# Altium PCB npm1300_qeaa_config4.PcbDoc
Units mm, origin at the board's own origin, x right, y up, seen from the top; angles counter-clockwise.
Board outline 16.8 x 14 mm, 4 copper layers (Top Layer, Mid-Layer 1, Mid-Layer 2, Bottom Layer), stack 1.592 mm thick; 25 components, 32 nets, 81 pads, 59 vias.
Unrouted connection lines stored in the file: 23.
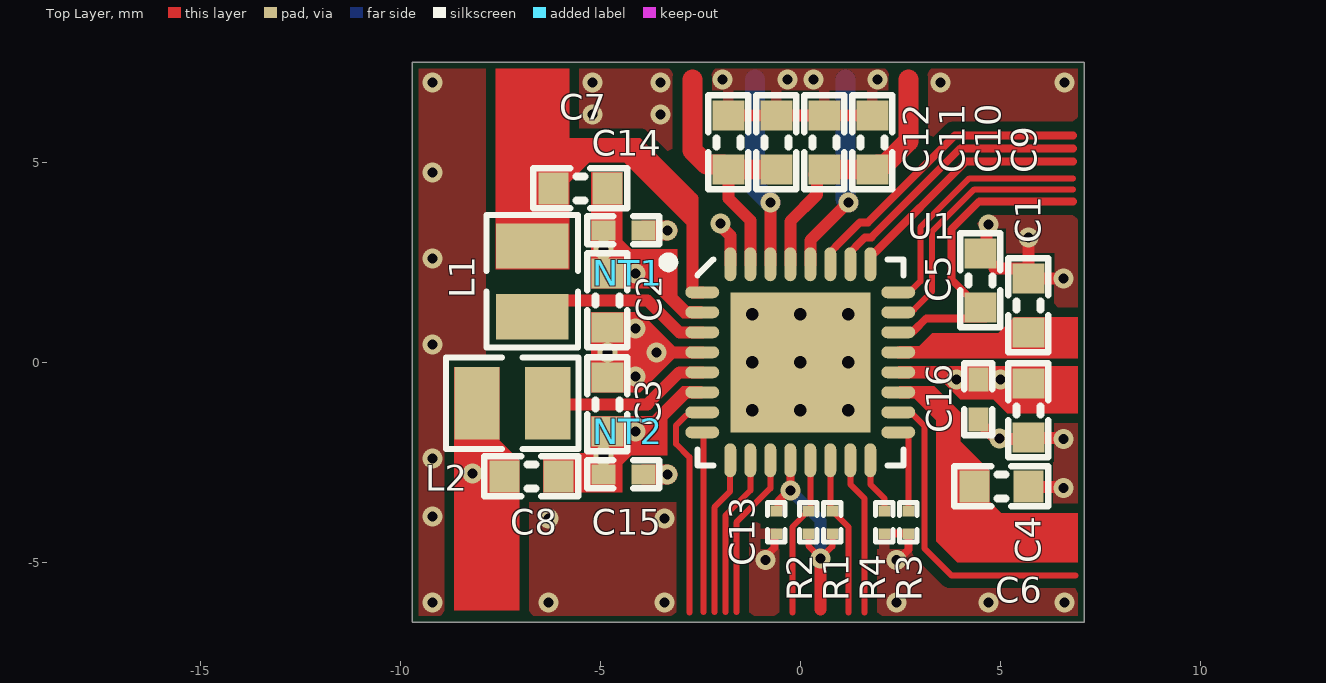
[diagram p0: Top Layer view]
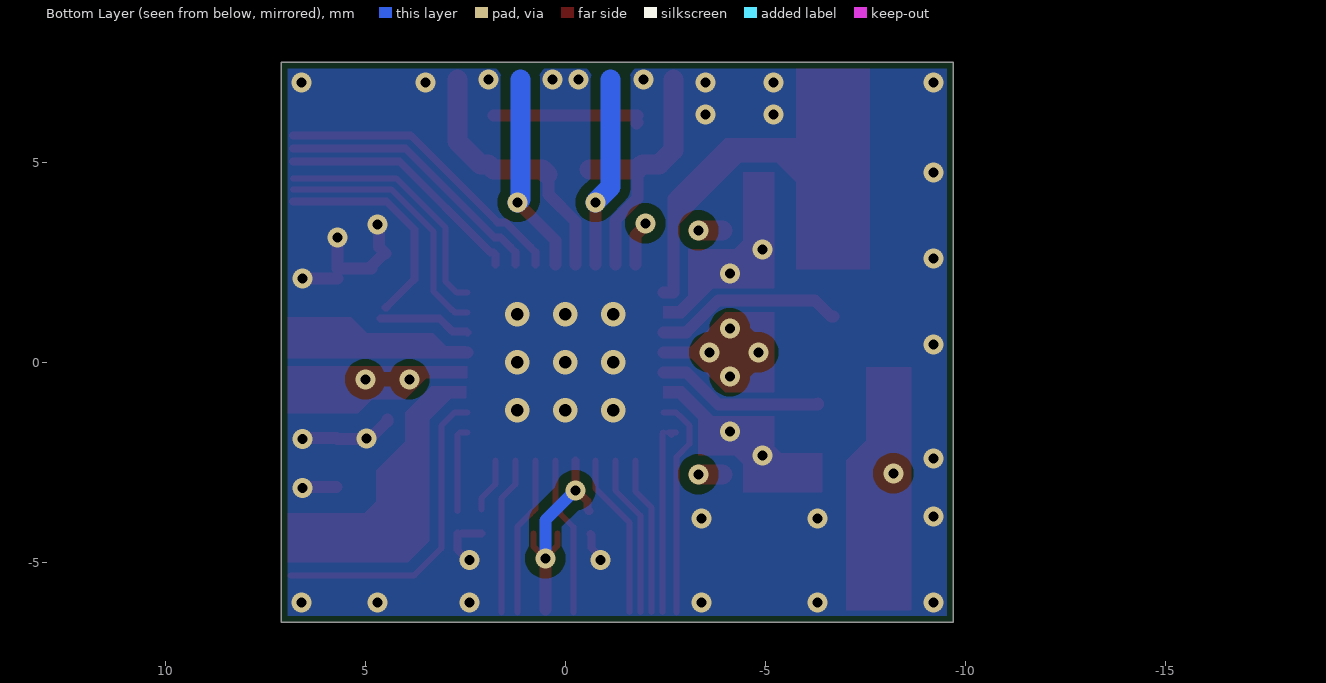
[diagram p1: Bottom Layer view, seen from below]
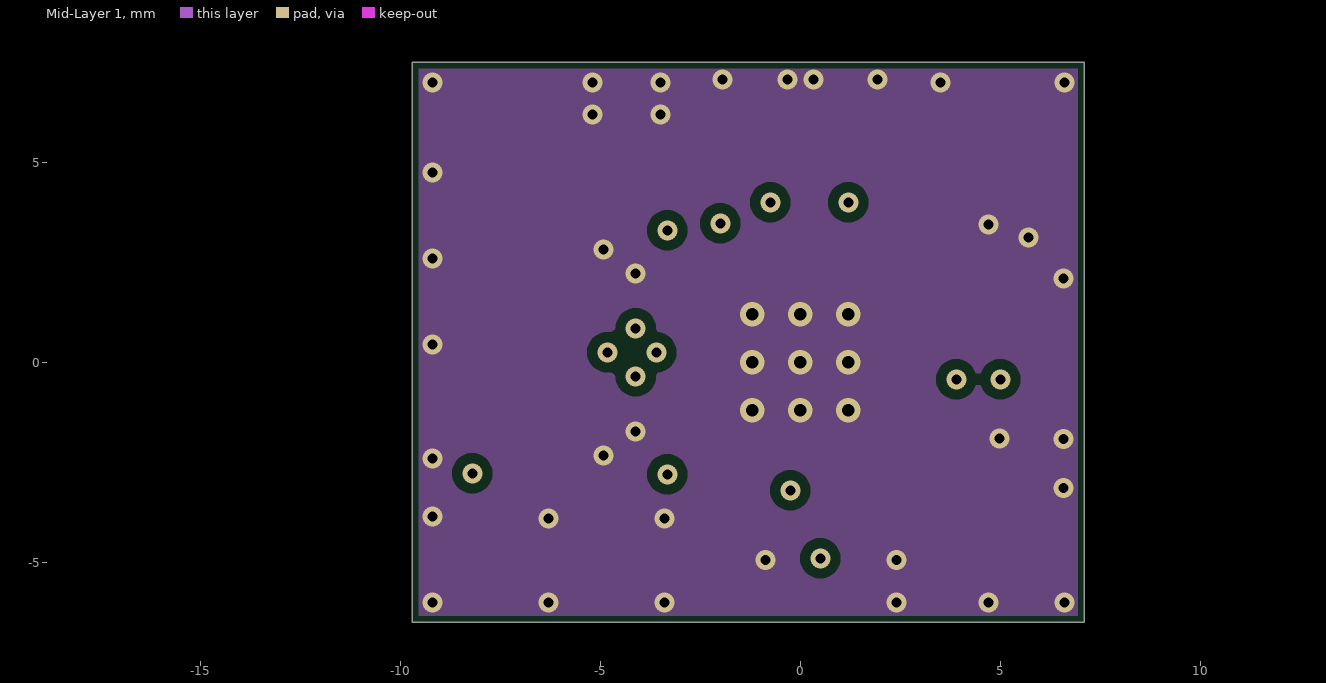
[diagram p2: Mid-Layer 1]
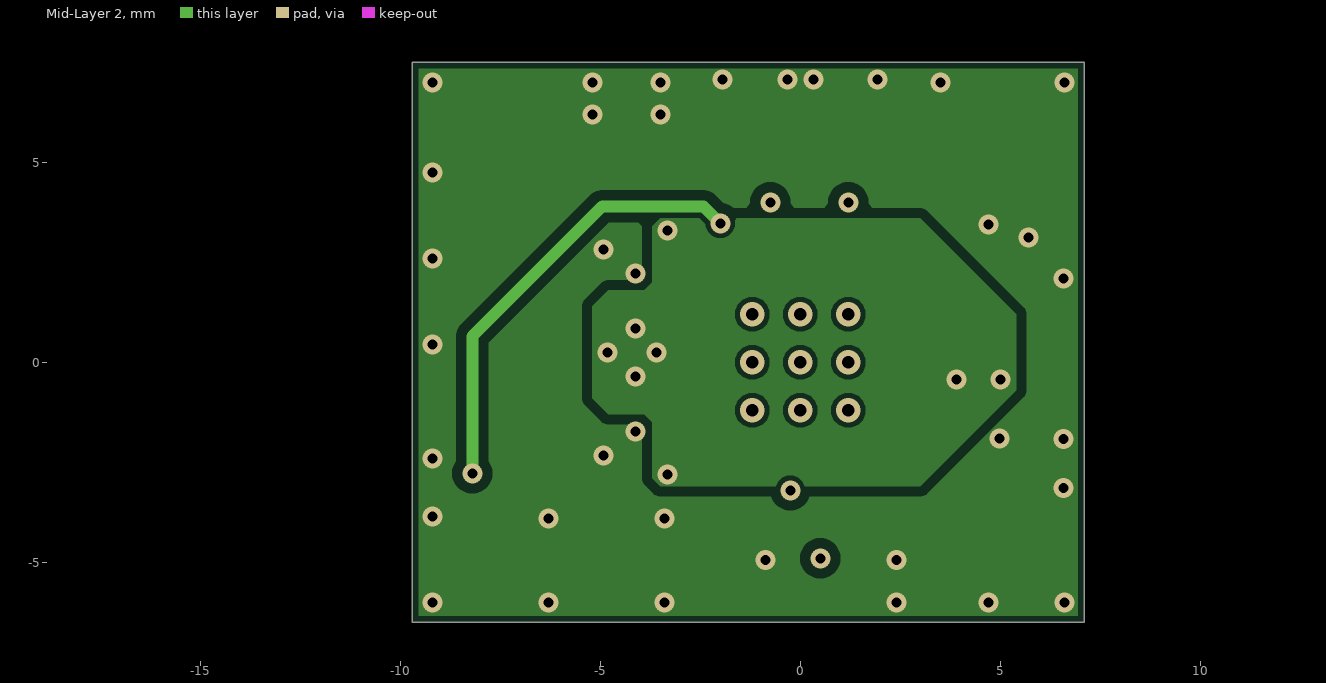
[diagram p3: Mid-Layer 2]
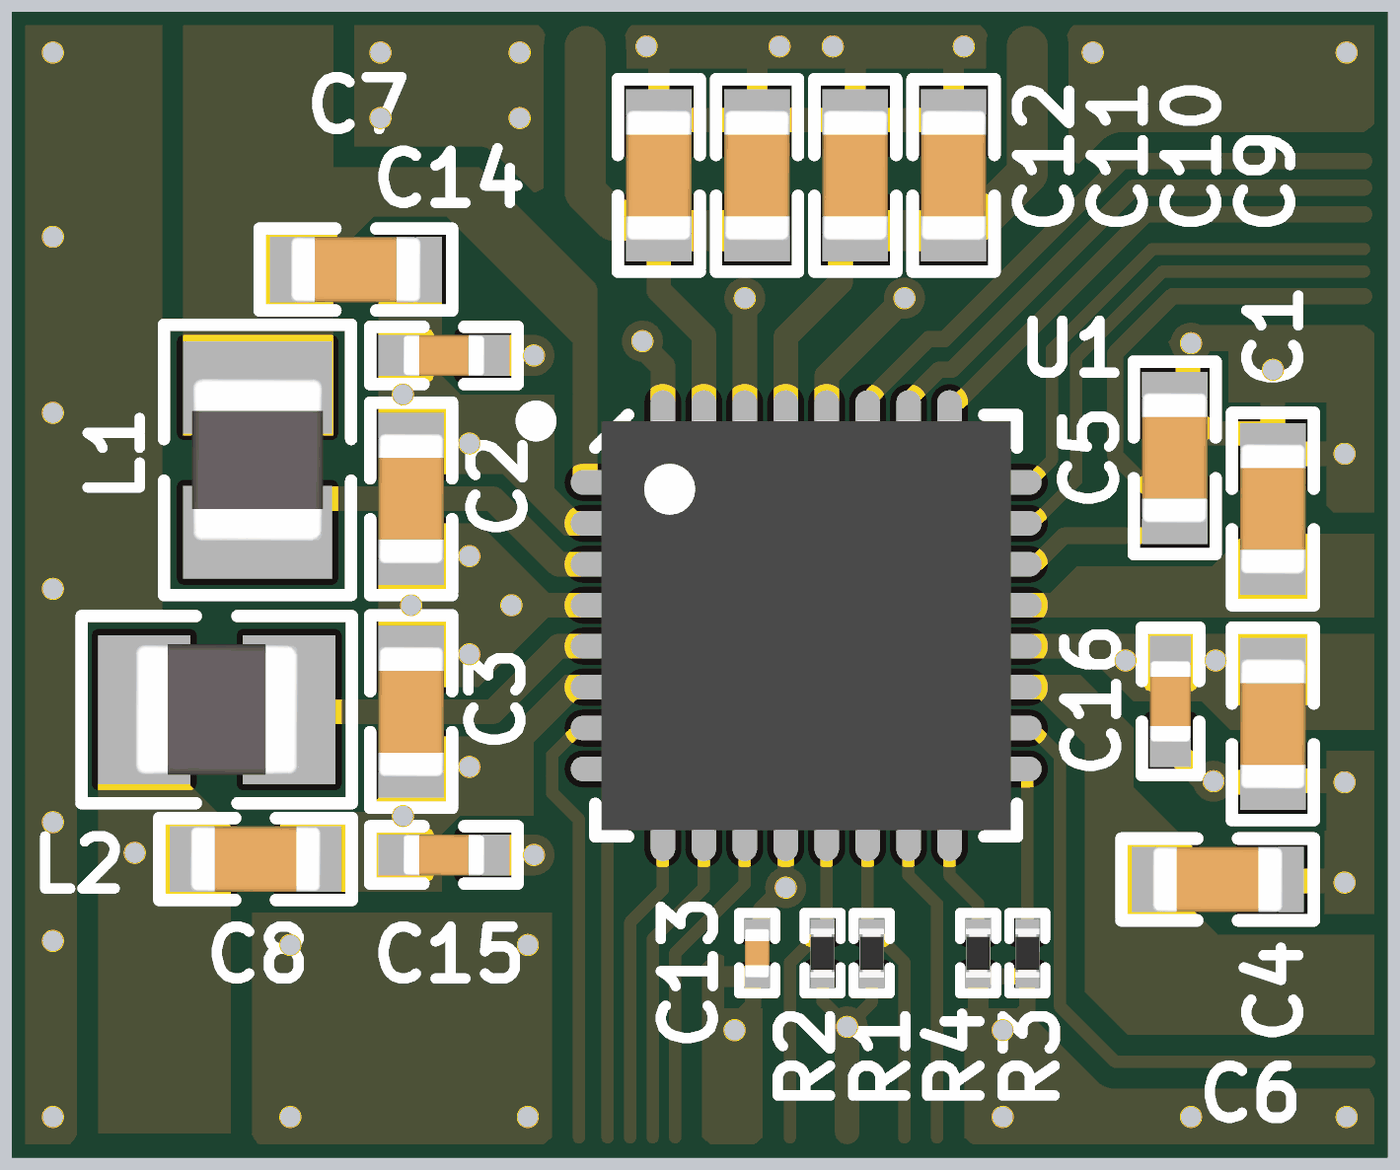
[diagram p4: 3D render of the assembled board from above, using the file's embedded part models]

## Layer stack, top to bottom
Top Solder: solder mask 0.0102, Solder Resist, Dk 3.5
Top Layer: signal copper 0.0356
Dielectric1: prepreg 0.075, FR-4, Dk 4.8
Mid-Layer 1: signal copper 0.0356
Dielectric2: core 1.3, FR-4, Dk 4.8
Mid-Layer 2: signal copper 0.0356
Dielectric 2: prepreg 0.075, FR-4, Dk 4.8
Bottom Layer: signal copper 0.0356
Bottom Solder: solder mask 0.0102, Solder Resist, Dk 3.5

## Board outline
-9.7,-6.5 -9.7,7.5 7.1,7.5 7.1,-6.5

## Design rules (kind name [scope] priority, off if disabled: settings)
BoardOutlineClearance [All] p1: gap=0.15 ignorepadtopadclearanceinfootprint=FALSE
Clearance Clearance_PVSS_Via [InNet('PVSS1') or InNet('PVSS2') vs InNet('GND')] p1: gap=0.125 ignorepadtopadclearanceinfootprint=FALSE except(0.025: SMDPad-Via) // PVSS1 and PVSS2 GND-via clearance
Clearance Polygon_Clearance [(InNamedPolygon('Top_Layer-GND')) or (InNamedPolygon('Bottom_Layer-GND')) or (InNamedPolygon('Mid_Layer_1-GND')) or (InNamedPolygon('Mid_Layer_2-GND'))] p2: gap=0.254 ignorepadtopadclearanceinfootprint=FALSE except(0: Arc-Hole Track-Hole SMDPad-Hole THPad-Hole Via-Hole Fill-Hole Poly-Hole Region-Hole Text-Hole)
Clearance [All] p3: gap=0.125 ignorepadtopadclearanceinfootprint=FALSE
ComponentClearance [All] p1 off: gap=0.254 collisioncheckmode=3 verticalgap=0.254 showdistances=FALSE
DiffPairsRouting [All] p1: maxlimit=0.15 minlimit=0.127 mostfreqgap=0.15 toplayer_mingap=0.15 toplayer_minwidth=0.15 toplayer_maxwidth=0.15 toplayer_prefwidth=0.15 bottomlayer_mingap=0.15 bottomlayer_minwidth=0.15 bottomlayer_maxwidth=0.15 bottomlayer_prefwidth=0.15 impedanceprofiledriven=TRUE impedanceprofileid={DBD80B30-E3CF-4860-A6C7-45E32F93C55D} impedanceprofilevalue=90.000000 maxuncoupledlength=12.7
FabricationTestPointUsage TestPointUsage [All] p1: valid=0 allowmultiple=FALSE
FabricationTestpoint Testpoint [All] p1: side=3 testpointundercomponent=TRUE minsize=1.016 maxsize=2.54 preferedsize=1.524 minholesize=0 maxholesize=1.016 preferedholesize=0.813 testpointgrid=0.025 allowsidetop=TRUE allowsidebottom=TRUE usegrid=TRUE gridtolerance=0
Height [All] p1 off: minheight=0 maxheight=25.4 prefheight=12.7
HoleSize [All] p1: absolutevalues=TRUE maxlimit=5 minlimit=0.1 maxpercent=80.000 minpercent=20.000
MinimumAnnularRing [All] p1 off: minimumring=0.75
PolygonConnect PolygonConnect_GND [InNet('GND')] p1: thpad.connectstyle=Relief thpad.reliefconductorwidth=0.254 thpad.reliefentries=4 thpad.polygonreliefangle="90 Angle" thpad.airgapwidth=0.254 smdpad.connectstyle=Relief smdpad.reliefconductorwidth=0.254 smdpad.reliefentries=4 smdpad.polygonreliefangle="90 Angle" smdpad.airgapwidth=0.254 via.connectstyle=Direct via.reliefconductorwidth=0.254 via.reliefentries=4 via.polygonreliefangle="90 Angle" via.airgapwidth=0.254
PolygonConnect [All] p2: connectstyle=Direct reliefconductorwidth=0.254 reliefentries=4 polygonreliefangle="90 Angle" airgapwidth=0.254
RoutingVias [All] p1: holewidth=0.305 width=0.61 viastyle="Through Hole" minholewidth=0.305 minwidth=0.61 maxholewidth=0.711 maxwidth=1.27 useviatemplates=TRUE viatemplateguid#1={6F225C6A-EE86-4657-A426-C9A0349870D4} viatemplatename#1=v50h25m0mx0
ShortCircuit ShortCircuit_PVSS [InNet('PVSS1') or InNet('PVSS2') vs InNet('GND')] p1: allowed=TRUE
ShortCircuit [All] p2: allowed=FALSE
SilkToSolderMaskClearance SilkscreenOverComponentPads [IsPad] p1: minsilkscreentomaskgap=0.254 clearancetoexposedcopper=TRUE
SolderMaskExpansion SolderMaskExpansion_Vias [IsVia] p1: expansion=0.102 istentingtop=TRUE
SolderMaskExpansion [All] p2: expansion=0.076 istentingtop=FALSE
SupplyNets "Schematic Supply Nets_13" [InNet('PVSS2')] p1: voltage=0.000
SupplyNets "Schematic Supply Nets_12" [InNet('VBUSOUT')] p2: voltage=0.000
SupplyNets "Schematic Supply Nets_11" [InNet('VINLDO2')] p3: voltage=0.000
SupplyNets "Schematic Supply Nets_10" [InNet('VBAT')] p4: voltage=0.000
SupplyNets "Schematic Supply Nets_9" [InNet('VOUTLDO1')] p5: voltage=0.000
SupplyNets "Schematic Supply Nets_8" [InNet('VOUTLDO2')] p6: voltage=0.000
SupplyNets "Schematic Supply Nets_7" [InNet('VDDIO')] p7: voltage=0.000
SupplyNets "Schematic Supply Nets_6" [InNet('GND')] p8: voltage=0.000
SupplyNets "Schematic Supply Nets_5" [InNet('VINLDO1')] p9: voltage=0.000
SupplyNets "Schematic Supply Nets_4" [InNet('VSYS')] p10: voltage=0.000
SupplyNets "Schematic Supply Nets_3" [InNet('VBUSIN')] p11: voltage=0.000
SupplyNets "Schematic Supply Nets_2" [InNet('PVSS1')] p12: voltage=0.000
SupplyNets "Schematic Supply Nets_1" [InNet('VOUT2')] p13: voltage=0.000
SupplyNets "Schematic Supply Nets" [InNet('VOUT1')] p14: voltage=0.000
UnRoutedNet [All] p1: checkbadconnections=TRUE
Width [All] p1: maxlimit=2 minlimit=0.12 preferedwidth=0.3
21 further rules are at their usual default settings.

## Components (designator, comment, footprint, x,y, rotation, side; value= is the part's Value field where it differs from the comment)
C1 "1.0µF" CAPC1608X06L 5.7,1.425 r270 top
C2 "10µF" CAPC1608X06L -4.825,1.55 r270 top
C3 "10µF" CAPC1608X06L -4.825,-1.05 r90 top
C4 "10µF" CAPC1608X06L 5.7,-1.2 r90 top
C5 "1.0µF" CAPC1608X06L 4.5,2.05 r270 top
C6 "2.2µF" CAPC1608X06L 5.025,-3.1 r180 top
C7 "10µF" CAPC1608X06L -5.5,4.35 r180 top
C8 "10µF" CAPC1608X06L -6.725,-2.85 r180 top
C9 "10µF" CAPC1608X06L 1.8,5.5 r270 top
C10 "10µF" CAPC1608X06L 0.6,5.5 r270 top
C11 "10µF" CAPC1608X06L -0.6,5.5 r270 top
C12 "10µF" CAPC1608X06L -1.8,5.5 r270 top
C13 "100nF" CAPC0603X03L_C -0.6,-4 r270 top
C14 "100nF" CAPC1005X04L -4.425,3.3 r180 top
C15 "100nF" CAPC1005X04L -4.425,-2.8 r180 top
C16 "100nF" CAPC1005X04L 4.45,-0.925 r270 top
L1 "2.2µH" INDC2016X10N -6.7,2.025 r270 top
L2 "2.2µH" INDC2016X10N -7.2,-1.025 r0 top
NT1 "Net tie" "2 PIN STARPOINT" -4.317,2.225 r0 top net-tie
NT2 "Net tie" "2 PIN STARPOINT" -4.317,-1.725 r0 top net-tie
R1 "10k" RESC0603X03L_C 0.8,-4 r270 top
R2 "10k" RESC0603X03L_C 0.2,-4 r270 top
R3 "47k" RESC0603X03L_C 2.7,-4 r270 top
R4 "150k" RESC0603X03L_C 2.1,-4 r270 top
U1 "nPM1300-QEAA" Nordic_QFN50P500X500X90-33N 0,0 r0 top locked

## Footprints (in the part's own frame and the unit in brackets; to place one, negate y for a bottom-side part, rotate by r counter-clockwise, add the part's x,y. Pads: shape width x height; smd on the part's side, far side on the other; paste and mask are expansions set on the pad)
"2 PIN STARPOINT" [mil]
  round 6 smd paste-196.85 mask-196.85: 1(8,0) 2(-8,0)
  Top Layer region: -8,-3 8,-3 8,3 -8,3
CAPC0603X03L_C [mm] "Chip Capacitor, 2-Leads, Body 0.6x0.3mm, IPC High Density"
  rect 0.27x0.3 smd mask+0.05: 1(-0.285,0) 2(0.285,0)
  silkscreen extent -0.49,-0.22 0.49,0.22, body extent -0.3,-0.15 0.3,0.15, height 0.3
CAPC1005X04L [mm] "Chip Capacitor, 2-Leads, Body 1.0x0.5mm, IPC High Density"
  rect 0.6x0.5 smd: 1(-0.5,0) 2(0.5,0)
  silkscreen extent -0.9,-0.35 0.9,0.35, body extent -0.5,-0.25 0.5,0.25, height 0.5
CAPC1608X06L [mm] "Chip Capacitor, 2-Leads, Body 1.6x0.8mm, IPC High Density"
  rect 0.75x0.8 smd: 1(-0.675,0) 2(0.675,0)
  silkscreen extent -1.17,-0.5 1.17,0.5, body extent -0.8,-0.4 0.8,0.4, height 0.8
INDC2016X10N [mm] "Chip Inductor, 2-Leads, Body 2.00x1.60mm, IPC Medium Density"
  rect 1.13x1.82 smd: 1(-0.885,0) 2(0.885,0)
  silkscreen extent -1.65,-1.14 1.65,1.14, body extent -1,-0.8 1,0.8, height 1
Nordic_QFN50P500X500X90-33N [mm] "QFN32 5x5x0.85mm, 0.5mm pitch - Medium Density"
  oval 0.85x0.3 smd mask+0.076: 1(-2.45,1.75) 2(-2.45,1.25) 3(-2.45,0.75) 4(-2.45,0.25) 5(-2.45,-0.25) 6(-2.45,-0.75) 7(-2.45,-1.25) 8(-2.45,-1.75) 17(2.45,-1.75) 18(2.45,-1.25) 19(2.45,-0.75) 20(2.45,-0.25) 21(2.45,0.25) 22(2.45,0.75) 23(2.45,1.25) 24(2.45,1.75)
  oval 0.3x0.85 smd mask+0.076: 9(-1.75,-2.45) 10(-1.25,-2.45) 11(-0.75,-2.45) 12(-0.25,-2.45) 13(0.25,-2.45) 14(0.75,-2.45) 15(1.25,-2.45) 16(1.75,-2.45) 25(1.75,2.45) 26(1.25,2.45) 27(0.75,2.45) 28(0.25,2.45) 29(-0.25,2.45) 30(-0.75,2.45) 31(-1.25,2.45) 32(-1.75,2.45)
  rect 3.5x3.5 smd: 33(0,0)
  silkscreen extent -3.42,-2.57 2.57,2.62, body extent -2.5,-2.5 2.5,2.5, height 0.9
RESC0603X03L_C [mm] "Chip Resistor, 2-Leads, Body 0.6x0.3mm, IPC High Density"
  rect 0.27x0.3 smd: 1(-0.285,0) 2(0.285,0)
  silkscreen extent -0.49,-0.22 0.49,0.22, body extent -0.3,-0.15 0.3,0.15, height 0.23

## Part data
C1 C5: library part C0603-1µ0-10V-X5R, "Capacitor, Ceramic, 1.0µF 10V X5R 0603,±10%", Manufacturer=N.A., Part number NEMS=100200528, Artikkelnr Noca=N.A., Author=getr, Component Class=Capacitors, Component Status=Active, ComponentLink1Description=Datasheet, ComponentLink1URL=N.A., ComponentLink2Description="Supplier link", ComponentLink2URL=N.A., Footprint Doc=0603, HelpURL=N.A., LatestRevisionDate=2022-10-06, Manufacturer Part Number=N.A., Note=10V, Pad Count=2, Part Number=C0603-1µ0-10V-X5R, Part number IPS=N.A., Part number Norautron=N.A., PartId=100200528, Published=2022-10-06, Supplier 1=N.A., Supplier 2=N.A., Supplier Part Number 1=N.A., Supplier Part Number 2=N.A.
C2 C3 C4 C7 C8 C9 C10 C11 C12: library part C0603-10µ, "Capacitor, X5R, ±20%", Manufacturer=N.A., Part number IPS=00000007785, Part number NEMS=100200275, Artikkelnr Noca=20039234, Author=rsk, Component Class=Capacitors, Component Status=Active, ComponentLink1Description=Datasheet, ComponentLink1URL=N.A., ComponentLink2Description="Supplier link", ComponentLink2URL=N.A., Footprint Doc=0603, HelpURL=N.A., LatestRevisionDate=2011-01-17, Manufacturer Part Number=N.A., Note=6.3V, Pad Count=2, Part Number=C0603-10µ, Part number Norautron=N.A., PartId=100200275, Published=2011-01-17, Supplier 1=N.A., Supplier 2=N.A., Supplier Part Number 1=N.A., Supplier Part Number 2=N.A.
C6: library part C0603-2.2µ-16V-X7R, "Capacitor, Ceramic, X7R, ±10%, 16V", Manufacturer="Taiyo Yuden", Manufacturer Part Number=EMK107BB7225KA-T, Part number IPS=N.A., Part number NEMS=100200439, Supplier Part Number 1=587-5835-2-ND, Artikkelnr Noca=N.A., Author=rsk, Component Class=Capacitors, Component Status=Active, ComponentLink1Description=Datasheet, ComponentLink1URL=https://ds.yuden.co.jp/TYCOMPAS/ut/specSheet?pn=EMK107BB7225KA-T, ComponentLink2Description="Supplier link", ComponentLink2URL=https://ds.yuden.co.jp/TYCOMPAS/ut/detail?pn=EMK107BB7225KA-T&u=M, Footprint Doc=0603, HelpURL=https://www.digikey.no/product-detail/en/taiyo-yuden/EMK107BB7225KA-T/587-5835-2-ND/4970646, LatestRevisionDate=2020-10-13, Note=16V, Pad Count=2, Part Number=C0603-2.2µ-16V-X7R, Part number Norautron=N.A., PartId=100200439, Published=2020-02-03, Supplier 1=Digi-Key, Supplier 2=N.A., Supplier Part Number 2=N.A.
C13: library part C0201-100n, "Capacitor, X5R, ±10%, 100nF, 16V", Manufacturer=N.A., Part number IPS="00000001248, 00000002505", Part number NEMS=100200078, Part number Norautron=262071862, Artikkelnr Noca=N.A., Author=rsk, Component Class=Capacitors, Component Status=Active, ComponentLink1Description=Datasheet, ComponentLink1URL=N.A., ComponentLink2Description="Supplier link", ComponentLink2URL=N.A., Footprint Doc=0201, HelpURL=N.A., LatestRevisionDate=2024-06-27, Manufacturer Part Number=N.A., Note=16V, Pad Count=2, Part Number=C0201-100n, PartId=100200078, Published=2014-11-13, Supplier 1=N.A., Supplier 2=N.A., Supplier Part Number 1=N.A., Supplier Part Number 2=N.A.
C14 C15 C16: library part C0402-100n-16V-X7R-C0402C104M4RAC7867, "Capacitor, Ceramic, X7R, ±20%, 16V", Manufacturer=Kemet, Manufacturer Part Number=C0402C104M4RAC7867, Part number IPS=N.A., Part number NEMS=100200504, Supplier Part Number 1=399-C0402C104M4RAC7867CT-ND, Artikkelnr Noca=N.A., Author=getr, Component Class=Capacitors, Component Status=Active, ComponentLink1Description=Datasheet, ComponentLink1URL=https://api.kemet.com/component-edge/download/datasheet/C0402C104M4RACTU.pdf, ComponentLink2Description="Supplier link", ComponentLink2URL=https://www.digikey.no/no/products/detail/kemet/C0402C104M4RAC7867/2196240?s=N4IgTCBcDaIMIAYAsCxwIzILJIEoEE4B2ADgDYiQBdAXyA, Footprint Doc=0402, HelpURL=https://www.kemet.com/en/us/capacitors/ceramic/kc-link/product/C0402C104M4RACTU.html, LatestRevisionDate=2024-03-23, Note=16V, Pad Count=2, Part Number=C0402-100n-16V-X7R-C0402C104M4RAC7867, Part number Norautron=N.A., PartId=100200504, Published=2022-03-23, Supplier 1=Digi-Key, Supplier 2=N.A., Supplier Part Number 2=N.A.
L1 L2: library part L0806-2µ2-2500mA-73mOhm-CIGT201610EH2R2MNE, "Inductor, Irms=2.5A, Isat=2.9A, ±20%, DCR=73mΩ", Manufacturer="Samsung Electro-Mechanics America", Manufacturer Part Number=CIGT201610EH2R2MNE, Part number IPS=N.A., Part number NEMS=100300400, Part number Norautron=26521789, Supplier Part Number 1=1276-6901-1-ND, Artikkelnr Noca=N.A., Author=rsk, Component Class=Inductors, Component Status=Active, ComponentLink1Description=Datasheet, ComponentLink1URL=https://media.digikey.com/pdf/Data%20Sheets/Samsung%20PDFs/CIGT201610EH2R2MNE_Spec.pdf, ComponentLink2Description="Supplier link", ComponentLink2URL=https://www.digikey.com/en/products/detail/samsung-electro-mechanics/CIGT201610EH2R2MNE/7041223?s=N4IgTCBcDaIMIEkDiAVMAGAjANk%2BgogBJgBKYAsgHL4gC6AvkA, Footprint Doc=0806, HelpURL=http://product.samsungsem.com/pi/CIGT201610EH2R2MN.do, LatestRevisionDate=2022-09-07, Note="Unshielded Thin Film Inductor", Pad Count=2, Part Number=L0806-2µ2-2500mA-73mOhm-CIGT201610EH2R2MNE, PartId=100300400, Published=2021-02-03, Supplier 1=Digi-Key, Supplier 2=Mouser, Supplier Part Number 2=187-CIGT201610EH2R2M
NT1 NT2: library part "2 pin starpoint", "Starpoint", Manufacturer=N.A., Part number NEMS=100500603, Artikkelnr Noca=N.A., Author=rsk, Component Class=Connectors, Component Status=Active, ComponentLink1Description=Datasheet, ComponentLink1URL=N.A., ComponentLink2Description="Supplier link", ComponentLink2URL=N.A., Footprint Doc=N.A., HelpURL=N.A., LatestRevisionDate=2017-08-31, Manufacturer Part Number=N.A., Note=N.A., Pad Count=2, Part Number="2 pin starpoint", Part number IPS=N.A., Part number Norautron=N.A., PartId=100500603, Published=2017-08-31, Supplier 1=N.A., Supplier 2=N.A., Supplier Part Number 1=N.A., Supplier Part Number 2=N.A.
R1 R2: library part R0201-10k, "Resistor, ±1%, 0.05W", Manufacturer=N.A., Part number IPS=00000001255, Part number NEMS=100100065, Part number Norautron=26107101, Artikkelnr Noca=N.A., Author=rsk, Component Class=Resistors, Component Status=Active, ComponentLink1Description=Datasheet, ComponentLink1URL=N.A., ComponentLink2Description="Supplier link", ComponentLink2URL=N.A., Footprint Doc=0201, HelpURL=N.A., LatestRevisionDate=2014-11-13, Manufacturer Part Number=N.A., Note="Chip Res 1%", Pad Count=2, Part Number=R0201-10k, PartId=100100065, Published=2014-11-13, Supplier 1=N.A., Supplier 2=N.A., Supplier Part Number 1=N.A., Supplier Part Number 2=N.A.
R3: library part R0201-47k, "Resistor, ±1%, 0.05W", Manufacturer=N.A., Part number IPS=00000001423, Part number NEMS=100100076, Artikkelnr Noca=N.A., Author=rsk, Component Class=Resistors, Component Status=Active, ComponentLink1Description=Datasheet, ComponentLink1URL=N.A., ComponentLink2Description="Supplier link", ComponentLink2URL=N.A., Footprint Doc=0201, HelpURL=N.A., LatestRevisionDate=2014-11-13, Manufacturer Part Number=N.A., Note="Chip Res 1%", Pad Count=2, Part Number=R0201-47k, Part number Norautron=N.A., PartId=100100076, Published=2014-11-13, Supplier 1=N.A., Supplier 2=N.A., Supplier Part Number 1=N.A., Supplier Part Number 2=N.A.
R4: library part R0201-150k, "Resistor, ±1%, 0.05W", Manufacturer=N.A., Part number IPS=00000001422, Part number NEMS=100100082, Artikkelnr Noca=N.A., Author=rsk, Component Class=Resistors, Component Status=Active, ComponentLink1Description=Datasheet, ComponentLink1URL=N.A., ComponentLink2Description="Supplier link", ComponentLink2URL=N.A., Footprint Doc=0201, HelpURL=N.A., LatestRevisionDate=2014-11-13, Manufacturer Part Number=N.A., Note="Chip Res 1%", Pad Count=2, Part Number=R0201-150k, Part number Norautron=N.A., PartId=100100082, Published=2014-11-13, Supplier 1=N.A., Supplier 2=N.A., Supplier Part Number 1=N.A., Supplier Part Number 2=N.A.
U1: "Li-Ion/Li-Polymer USB-C battery charger with high efficiency buck regulators, LDOs or load switches, LED drivers, TWI and VBUSOUT", Manufacturer="Nordic Semiconductor", Part number IPS=N.A., Part number NEMS=102000291, Artikkelnr Noca=N.A., Author=eisk, Component Class=Nordic_Devices, Component Status=Active, ComponentLink1Description=Datasheet, ComponentLink1URL=N.A., ComponentLink2Description="Supplier link", ComponentLink2URL=N.A., Footprint Doc=QFN-32, HelpURL=N.A., LatestRevisionDate=2023-05-25, Manufacturer Part Number=nPM1300-QEAA, Note=N.A., Pad Count=33, Part Number=nPM1300-QEAA, Part number Norautron=N.A., PartId=102000291, Published=2022-02-17, Supplier 1="Nordic Semiconductor", Supplier 2=N.A., Supplier Part Number 1=nPM1300-QEAA, Supplier Part Number 2=N.A.

## Via types
v1: diameter 0.5, hole 0.25, Top Layer to Bottom Layer, tented both sides, 50 vias
v2: diameter 0.61, hole 0.305, Top Layer to Bottom Layer, tented both sides, 9 vias

## Nets (pads, with @x,y where several pads share a name; then routed paths per layer and width w, separated by ;. In a path a pad name is that pad's centre, name@x,y a point inside that pad or via, vN(x,y) a via of type N, cw(c..) or ccw(c..) an arc to the next point about the centre after c; other vN are vias at no path point)
CC1: U1.23 | length 6.5
  Top Layer w0.15: U1.23 2.766,1.25 2.841,1.325 2.851,1.325 3.299,1.772 3.299,3.273 4.351,4.325 6.813,4.325
CC2: U1.24 | length 6.3
  Top Layer w0.15: U1.24 2.725,1.75 3,2.025 3,3.375 4.225,4.6 6.813,4.6
GND: C1.1 C4.1 C5.1 C6.1 C9.1 C10.1 C11.1 C12.1 C13.2 C16.2 NT1.1 NT2.1 R3.2 R4.2 U1.33 | length 12.7
  Top Layer w0.2: v1(-0.875,-4.941) -0.875,-4.859 -0.65,-4.634 -0.65,-4.315 C13.2@-0.627,-4.292 ; R4.2 R3.2@2.585,-4.285 ; v1(2.4,-4.941) 2.444,-4.941 2.7,-4.685 R3.2
  Top Layer w0.3: C12.1@-1.8,6 C12.1@-1.775,5.975 ; C12.1 C10.1 C9.1 ; C16.2 4.45,-1.475 v1@4.925,-1.95 ; v1(4.7,3.45) 4.662,3.412 4.662,2.887 C5.1 4.525,2.725 4.85,2.4 4.85,2.35 5.7,2.35 v1(5.7,3.125) ; v1@4.987,-1.912 5.7,-1.912 5.719,-1.894 6.556,-1.894 v1(6.575,-1.912) ; C1.1 v1(6.575,2.1) ; C6.1@5.719,-3.119 v1@6.556,-3.119
  other v1: -9.2,-6 -6.3,-6 -3.4,-6 2.4,-6 4.7,-6 6.6,-6 -6.3,-3.9 -3.4,-3.9 -9.2,-3.85 6.575,-3.137 -9.2,-2.4 -4.925,-2.325 4.975,-1.9 -4.113,-1.725 -9.2,0.45 -4.113,2.225 -9.2,2.6 -4.925,2.825 -9.2,4.75 -5.2,6.2 -3.5,6.2 -9.2,7 -5.2,7 -3.5,7 3.5,7 6.6,7 -1.95,7.075 -0.325,7.075 0.325,7.075 1.925,7.075
  other v2: -1.2,-1.2 0,-1.2 1.2,-1.2 -1.2,0 0,0 1.2,0 -1.2,1.2 0,1.2 1.2,1.2
GPIO0: U1.7 | length 5.6
  Top Layer w0.15: -2.775,-6.25 -2.775,-2.372 -3.103,-2.044 -3.103,-1.578 -2.85,-1.325 -2.841,-1.325 -2.766,-1.25 U1.7
GPIO1: U1.8 | length 4.8
  Top Layer w0.15: U1.8@-2.762,-1.75 -2.581,-1.75 U1.8@-2.65,-1.819 ; U1.8 -2.425,-1.775 -2.425,-6.249
GPIO2: U1.9 | length 4
  Top Layer w0.15: -2.15,-6.249 -2.15,-3.625 -1.753,-3.228 -1.753,-2.453 U1.9
GPIO3: U1.10 | length 4.1
  Top Layer w0.15: -1.875,-6.249 -1.875,-3.83 -1.25,-3.205 U1.10
GPIO4: U1.11 | length 4.2
  Top Layer w0.15: -1.6,-6.249 -1.6,-4 -0.75,-3.15 U1.11
LED0: U1.25 | length 6.3
  Top Layer w0.2: U1.25 1.75,2.698 1.796,2.744 1.869,2.744 4.15,5.025 6.813,5.025
LED1: U1.26 | length 6.9
  Top Layer w0.2: U1.26 1.25,2.752 1.375,2.877 1.375,2.88 1.62,3.125 1.775,3.125 4,5.35 6.813,5.35
LED2: U1.27 | length 7.6
  Top Layer w0.2: U1.27 0.75,2.752 0.875,2.877 0.875,2.88 1.495,3.5 1.69,3.5 3.865,5.675 6.813,5.675
NTC: U1.18 | length 7.9
  Top Layer w0.15: U1.18 2.761,-1.25 3.1,-1.589 3.1,-4.65 3.775,-5.325 6.875,-5.325
PVSS1: C2.1 C7.1 C14.2 NT1.2 U1.2
PVSS2: C3.1 C8.1 C15.2 NT2.2 U1.6
SCL: R1.1 U1.14 | length 4
  Top Layer w0.15: U1.14 0.75,-3.665 R1.1 0.815,-3.715 0.875,-3.775 0.875,-3.79 1.2,-4.115 1.2,-6.25
SDA: R2.1 U1.13 | length 4
  Top Layer w0.15: -0.2,-6.25 -0.2,-4.117 0.125,-3.792 0.125,-3.775 0.22,-3.68 0.25,-3.68 U1.13
SHPHLD: U1.15 | length 3.9
  Top Layer w0.15: U1.15 1.25,-3.05 1.6,-3.4 1.6,-6.25
SW1: L1.2 U1.3 | length 4.8
  Top Layer w0.3: L1.2 -6.65,1.14 -6.24,1.55 -3.825,1.55 -3.025,0.75 -2.725,0.75 U1.3
SW2: L2.2 U1.5 | length 4.2
  Top Layer w0.3: L2.2 -6.315,-1.05 -3.825,-1.05 -3.025,-0.25 -2.725,-0.25 U1.5
VBAT: C6.2 U1.19
VBUSIN: C1.2 U1.21 | length 3.2
  Top Layer w0.3: U1.21 3.487,0.25 4.775,0.25 5.221,0.696 ; C1.2@5.321,0.696 C1.2@5.546,0.696
VBUSOUT: C5.2 U1.22 | length 7.9
  Top Layer w0.2: U1.22 2.469,0.769 2.819,0.769 3.15,1.1 C5.2@4.625,1.1 ; C5.2 4.475,1.375 3.775,2.075 3.775,3.325 4.475,4.025 6.813,4.025
VDDIO: C13.1 R1.2 R2.2 U1.12 | length 6.2
  Top Layer w0.15: R2.2 0.2,-4.586 v1@0.45,-4.836 ; v1@0.5,-4.786 v1(0.5,-4.9) 0.8,-4.6 R1.2
  Top Layer w0.2: C13.1 -0.585,-3.715 -0.55,-3.68 -0.55,-3.467 -0.283,-3.2 v1(-0.25,-3.2) -0.25,-3 U1.12
  Top Layer w0.3: 0.5,-6.182 v1(0.5,-4.9)
  Bottom Layer w0.3: v1(-0.25,-3.2) 0.5,-3.95 v1(0.5,-4.9)
VINLDO1: U1.28 | length 5
  Top Layer w0.3: U1.28 0.25,3.05 v1(1.2,4)
  Bottom Layer w0.5: 1.125,7.075 1.125,4.075 v1(1.2,4)
VINLDO2: U1.30 | length 4.8
  Top Layer w0.3: U1.30 v1(-0.75,4)
  Bottom Layer w0.5: -1.135,7.075 -1.135,4.385 v1(-0.75,4)
VOUT1: C7.2 L1.1 U1.1 | length 3.5
  Top Layer w0.3: -3.352,4.744 -2.7,4.091 -2.7,1.75 U1.1
VOUT2: C8.2 L2.1 U1.32 | length 12.3
  Top Layer w0.3: v1(-2,3.475) -2,3.421 -1.75,3.171 U1.32
  Mid-Layer 2 w0.3: v1(-8.2,-2.775) -8.2,0.65 -4.95,3.9 -2.425,3.9 v1(-2,3.475)
VOUTLDO1: C9.2 C10.2 U1.29 | length 6.7
  Top Layer w0.3: U1.29 -0.25,3.525 0.419,4.194 0.419,4.669 C10.2@0.45,4.7
  Top Layer w0.5: C10.2@0.45,4.7 0.575,4.825 C10.2 C9.2 1.925,4.95 2.125,4.95 2.7,5.525 2.7,7.075
VOUTLDO2: C11.2 C12.2 U1.31 | length 6.7
  Top Layer w0.3: C12.2 -1.8,4.1 -1.25,3.55 U1.31
  Top Layer w0.5: -2.7,7.075 -2.7,5.3 -2.35,4.95 -1.925,4.95 C12.2 C11.2
VSET1: R3.1 U1.17 | length 2.2
  Top Layer w0.15: U1.17 2.631,-1.75 2.7,-1.819 R3.1
VSET2: R4.1 U1.16 | length 1.4
  Top Layer w0.15: U1.16 1.75,-3.05 2.1,-3.4 R4.1@2.1,-3.684
VSYS: C2.2 C3.2 C4.2 C14.1 C15.1 C16.1 U1.4 U1.20 | length 2.3
  Top Layer w0.3: v1(-3.6,0.25) U1.4
  Top Layer w0.5: C15.1 v1(-3.325,-2.8) ; C14.1 v1(-3.325,3.3)
  other v1: 3.9,-0.425 5,-0.425 -4.113,-0.35 -4.825,0.25 -4.113,0.85

## Polygon pours and split planes (outlines as drawn)
GND on Bottom Layer "Bottom_Layer-GND" (solid, remove dead copper, pour order 27): -9.7,-6.5 7.1,-6.5 7.1,7.5 -9.7,7.5
GND on Mid-Layer 1 "Mid_Layer_1-GND" (solid, remove dead copper, pour order 24): -9.7,-6.5 7.1,-6.5 7.1,7.5 -9.7,7.5
VSYS on Mid-Layer 2 "VSYS_PWR" (solid, pour order 25): -3.5,-3.1 -3.7,-2.9 -3.7,-1.5 -3.9,-1.3 -4.8,-1.3 -5.2,-0.9 -5.2,1.4 -4.8,1.8 -3.9,1.8 -3.7,2 -3.7,3.4 -3.5,3.6 3,3.6 5.4,1.2 5.4,-0.7 3,-3.1
GND on Mid-Layer 2 "Mid_Layer_2-GND" (solid, remove dead copper, pour order 26): -9.7,-6.5 7.1,-6.5 7.1,7.5 -9.7,7.5
GND on Top Layer "Top_Layer-GND" (solid, remove dead copper, pour order 21): -9.7,-6.5 7.1,-6.5 7.1,7.5 -9.7,7.5

## Other copper
Top Layer:
  pour cut-out: -6.85,-2.716 -6.85,-3.505 -3.105,-3.505 -3.105,-2.716
  region net VOUT2: -8.65,-2.95 -8.35,-3.25 -8.344,-3.244 -7.025,-3.244 -7.025,-2.45 -7.52,-1.955 -7.52,-0.121 -8.65,-0.121
  region net VSYS: 2.45,-0.4 3.475,-0.4 4,-0.925 4.825,-0.925 5.175,-1.275 6.938,-1.275 6.938,-0.1 2.45,-0.1
  region net VOUT2: -7.025,-2.45 -7.025,-6.2 -8.65,-6.2 -8.65,-2.45
  region net VOUT1: -7.61,3.938 -7.61,7.338 -5.775,7.338 -5.775,3.938
  region net PVSS2: -5.225,-2.1 -5.4,-2.275 -6.425,-2.275 -6.425,-3.25 -4.45,-3.25 -4.45,-2.55 -4.225,-2.325 -3.325,-2.325 -3.325,-1.425 -2.8,-0.9 -2.45,-0.9 -2.45,-0.6 -2.95,-0.6 -3.7,-1.35 -5.225,-1.35
  region net PVSS1: -5.225,1.85 -3.7,1.85 -2.95,1.1 -2.45,1.1 -2.45,1.4 -2.8,1.4 -3.075,1.675 -3.075,2.825 -4.225,2.825 -4.45,3.05 -4.45,4.75 -5.225,4.75 -5.225,2.825
  region net VOUT1: -5.275,5 -4.4,5 -2.775,3.375 -2.65,3.375 -2.65,4.25 -4,5.6 -6.85,5.6 -7.61,4.84 -7.61,2.325 -5.775,2.325 -5.775,4.5
  region net VSYS: -3.15,0.4 -4,1.25 -5.225,1.25 -5.225,-0.75 -4,-0.75 -3.15,0.1
  pour cut-out: -7.864,2.325 -7.864,-0.115 -5.775,-0.115 -5.775,2.325
  region net VBAT: 2.475,-0.9 2.85,-0.9 3.4,-1.45 3.4,-4.475 3.925,-5 6.938,-5 6.938,-3.775 5.025,-3.775 4.725,-3.475 4.725,-2.7 4,-1.975 4,-1.25 3.35,-0.6 2.475,-0.6
  region net VBUSIN: 2.475,0.4 2.975,0.4 3.3,0.725 4.95,0.725 5.35,1.125 6.938,1.125 6.938,0.1 2.475,0.1
  pour cut-out: -1.85,1.85 1.85,1.85 1.85,-1.85 -1.85,-1.85
  pour cut-out: -17.9,1.7 -17.9,-3.2
  pour cut-out: 7.375,0.45 7.375,-0.41
Mid-Layer 1:
  pour cut-out: 11.025,5.525 12.025,5.525

## Silkscreen, mask and mechanical layers (free items; w line width, h text height)
Board Outline:
  the board outline again, w0.2

## Dimensions
7.1,7.5 to 7.1,-6.5 on Dimension
-9.7,-6.5 to 7.1,-6.5 on Dimension